# Altium PCB PCB.PcbDoc (part 6 of 6)
Units mm, origin at the board's own origin, x right, y up, seen from the top; angles counter-clockwise.
Board outline 56.61 x 57.68 mm, 2 copper layers (Top Layer, Bottom Layer), stack 0.572 mm thick; 104 components, 100 nets, 551 pads, 332 vias.
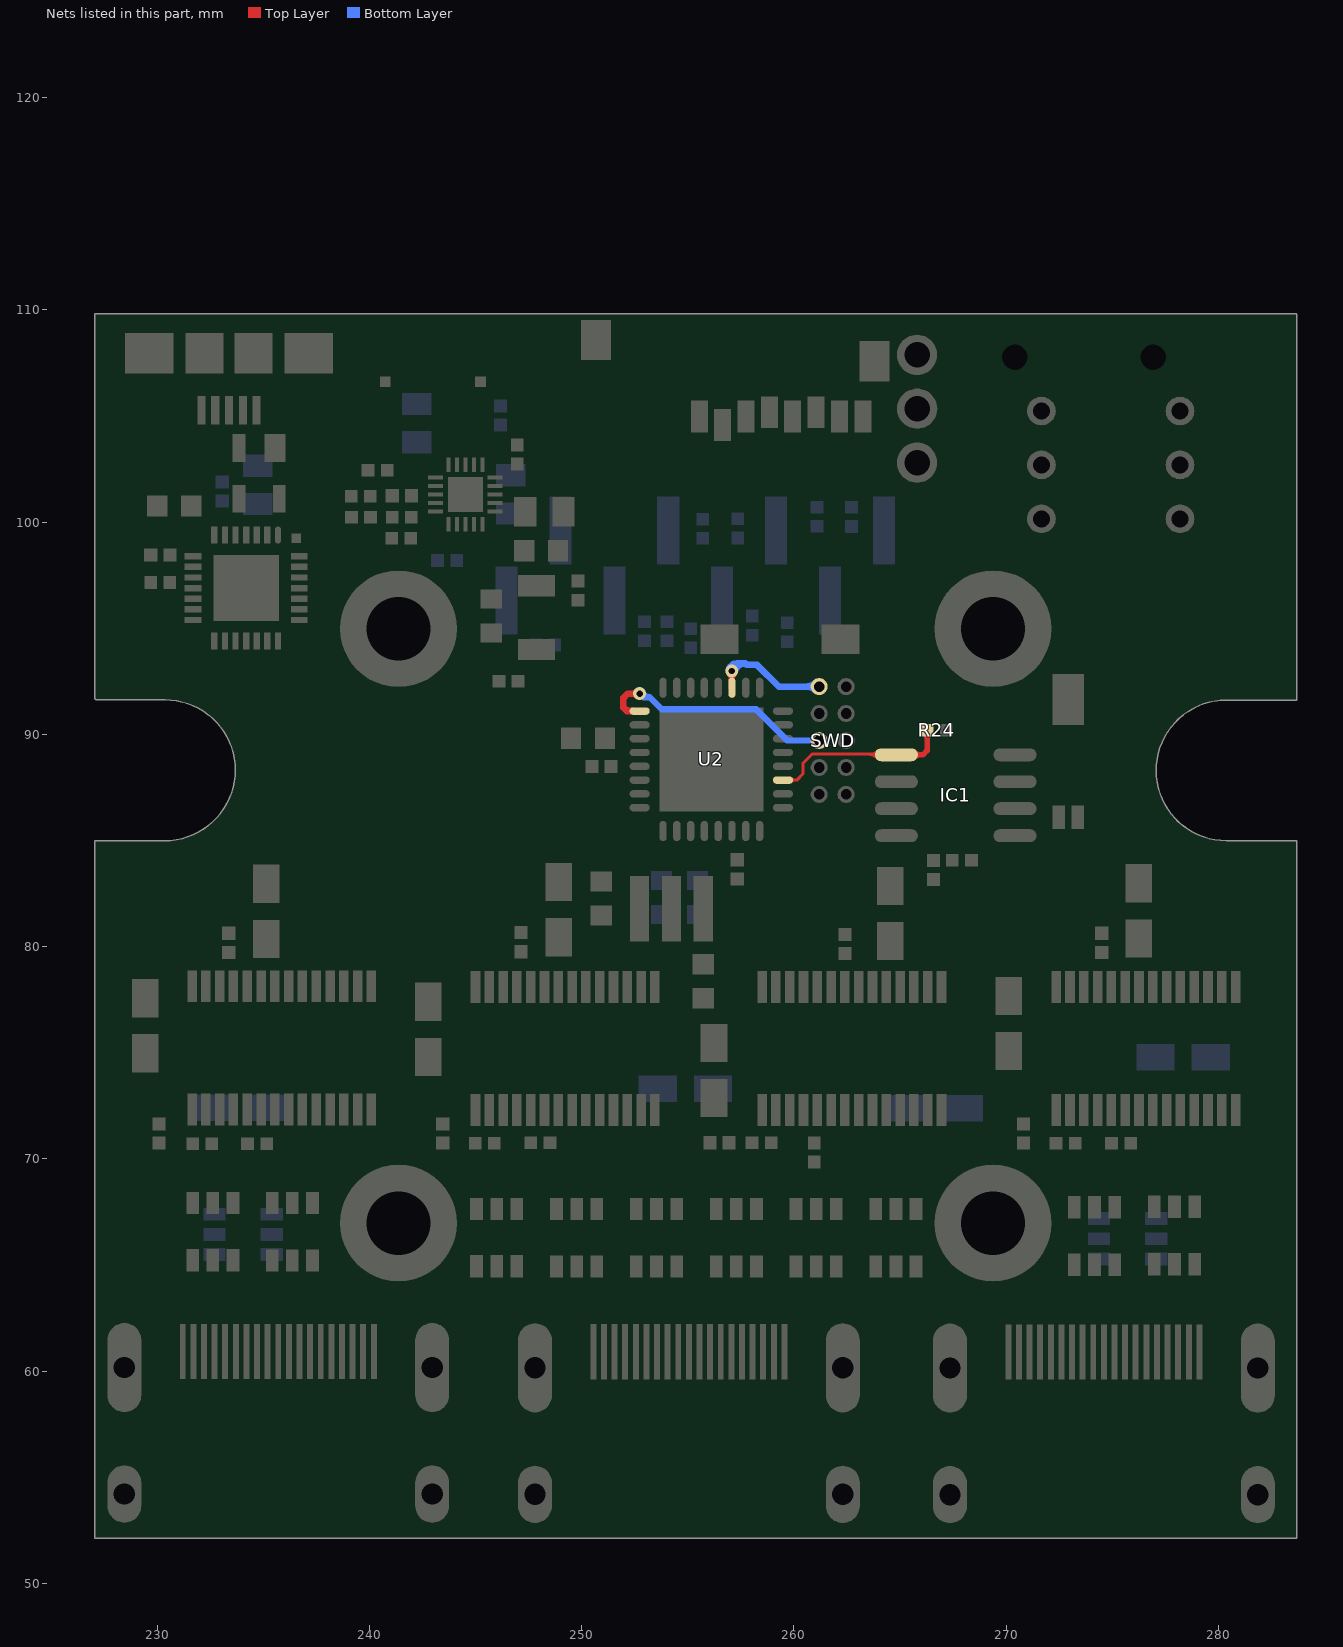
[diagram p6: the nets of this part, all layers, seen from the top]

## Via types
v1: diameter 0.6, hole 0.3, Top Layer to Bottom Layer, tented both sides, 242 vias
v2: diameter 0.6, hole 0.2, Top Layer to Bottom Layer, tented both sides, 80 vias
v3: diameter 0.8, hole 0.4, Top Layer to Bottom Layer, tented both sides, 9 vias
v4: diameter 0.66, hole 0.33, Top Layer to Bottom Layer, tented both sides, 1 vias

## Nets (pads, with @x,y where several pads share a name; then routed paths per layer and width w, separated by ;. In a path a pad name is that pad's centre, name@x,y a point inside that pad or via, vN(x,y) a via of type N, cw(c..) or ccw(c..) an arc to the next point about the centre after c; other vN are vias at no path point) (continued)
SDA: IC1.5 R24.2 U2.11 | length 13.7
  Top Layer w0.152: U2.11@259.483,87.849 260.137,87.849 260.426,88.138 260.426,88.646 260.852,89.071 IC1.5@264.794,89.071 ; 260.022,87.849 ccw(c260.022,87.61) 259.853,87.779 cw(c260.022,87.61) 260.022,87.849 ; 260.022,87.849 cw(c260.022,88.087) 259.853,87.919 ccw(c260.022,88.087) 260.022,87.849 ; 263.487,89.071 cw(c263.487,88.412) 263.953,88.878 ccw(c263.487,88.412) 263.487,89.071 ; 263.638,89.071 ccw(c263.638,89.516) 263.953,89.202 cw(c263.638,89.516) 263.638,89.071
  Top Layer w0.254: IC1.5@264.825,89.04 266.078,89.04 266.275,89.237 R24.2@266.275,90.195 ; 265.966,89.04 ccw(c265.966,88.611) 265.662,88.914 cw(c265.966,88.611) 265.966,89.04 ; 265.966,89.04 cw(c265.966,89.469) 265.662,89.166 ccw(c265.966,89.469) 265.966,89.04 ; 266.275,89.778 ccw(c265.858,89.778) 266.153,90.073 cw(c265.858,89.778) 266.275,89.778 ; 266.275,89.778 cw(c266.693,89.778) 266.398,90.073 ccw(c266.693,89.778) 266.275,89.778
SWCLK: SWD.1 U2.19 | length 11.8
  Top Layer w0.305: U2.19@257.073,92.209 v1(257.073,92.989) ; U2.19@257.073,92.633 ccw(c256.717,92.633) 256.969,92.885 cw(c256.717,92.633) U2.19@257.073,92.633 ; U2.19@257.073,92.633 cw(c257.43,92.633) 257.178,92.885 ccw(c257.43,92.633) U2.19@257.073,92.633
  Bottom Layer w0.305: v1(257.073,92.989) 257.073,93.066 257.353,93.345 ; SWD.1@261.188,92.253 259.283,92.253 258.262,93.274 257.788,93.274 257.717,93.345 ; 257.353,93.345 ccw(c257.673,93.024) 257.221,92.998 cw(c257.673,93.024) 257.353,93.345 ; 257.353,93.345 257.717,93.345 ; 257.717,93.345 ccw(c257.717,92.83) 257.217,92.954 cw(c257.717,92.83) 257.717,93.345 ; 260.59,92.253 ccw(c260.59,92.851) 261.013,92.428 cw(c260.59,92.851) 260.59,92.253 ; 260.59,92.253 cw(c260.59,91.655) 261.013,92.078 ccw(c260.59,91.655) 260.59,92.253 ; v1@256.921,93.027 cw(c257.327,92.926) 257.327,93.345 ccw(c257.327,92.926) v1@256.921,93.027
SWDIO: SWD.5 U2.25 | length 14.5
  Top Layer w0.305: v1@252.705,91.923 252.171,91.923 251.968,91.719 251.968,91.262 ; U2.25@252.733,91.099 252.131,91.099 251.968,91.262 ; 251.968,91.262 ccw(c252.331,91.626) 252.429,91.121 cw(c252.331,91.626) 251.968,91.262 ; 252.374,91.923 ccw(c252.374,92.279) 252.626,92.027 cw(c252.374,92.279) 252.374,91.923 ; 252.374,91.923 cw(c252.374,91.566) 252.626,91.818 ccw(c252.374,91.566) 252.374,91.923
  Bottom Layer w0.305: v1(252.73,91.923) 252.755,91.923 252.933,91.745 253.213,91.745 ; SWD.5@261.188,89.713 259.69,89.713 258.216,91.186 253.771,91.186 253.213,91.745 ; 253.213,91.745 cw(c253.213,92.118) 252.867,91.978 ccw(c253.213,92.118) 253.213,91.745
pads on no net: "SD CON.1" "SD CON.8" "SD CON." "SD CON.CD" "SD CON.COM" IC1.7 MEASURMENT.1 MEASURMENT.4 POWER.1 POWER.4 SWD.7 U1A.7 U1A.8 U1A.19 U1A.20 U1A.25 U1B.7 U1B.8 U1B.19 U1B.20 U1B.25 U1C.7 U1C.8 U1C.19 U1C.20 U1C.25 U1D.7 U1D.8 U1D.19 U1D.20 U1D.25 U2.1 U2.9 U2.12 U2.13 U2.16 U2.20 U2.21 U2.27 U2.28 U3.0 U3.1 U3.2 U3.3 U3.10 U3.11 U3.12 U3.13 U3.14 U3.15 U3.16 U3.17 U3.18 U3.19 U3.20 U3.21 U3.22 U3.23 U3.24 U3.27 U3.28 U3.29 U4.4 USB.4

## Polygon pours and split planes (outlines as drawn)
GND on Top Layer "Bottom Layer-No Net" (solid, pour order 1000): 226.974,109.88 226.974,91.567 227,91.542 230.937,91.542 231.089,91.542 233.375,89.256 233.401,89.23 233.401,86.766 232.918,86.766 231.292,85.141 231.216,85.065 227,85.065 227,52.095 227.152,51.943 227.279,52.07 283.769,52.07 283.769,85.065 280.213,85.065 279.629,85.065 277.368,87.325 277.368,89.687 277.419,89.687 278.867,91.135 279.171,91.44 281.153,91.44 283.667,91.44 283.743,91.516 283.718,91.542 283.718,109.855
GND on Bottom Layer "Bottom Layer-No Net" (solid, pour order 1001): 226.924,109.906 226.924,91.643 226.898,91.618 226.898,91.567 230.861,91.567 231.445,90.983 233.197,89.23 233.197,86.716 233.197,86.665 231.902,85.369 231.826,85.293 228.168,85.293 226.974,85.293 226.949,85.268 226.974,85.242 226.974,52.045 283.845,52.045 283.87,52.07 283.82,52.121 283.82,85.115 279.248,85.115 277.622,86.741 277.749,86.868 277.749,90.043 277.774,90.043 278.689,90.957 278.968,91.237 280.34,91.237 280.467,91.237 280.797,91.567 280.822,91.542 283.743,91.542 283.743,109.779 283.667,109.855

## Keep-outs
Keep-Out Layer:
  lines w0.127: 227.025,109.804 227.025,91.643 227.043,91.625 230.675,91.625 ; 227.07,109.81 283.67,109.81 ; 227.076,52.148 227.076,84.988 ; 227.085,52.145 283.68,52.145 283.68,84.985 ; 227.101,84.988 230.361,84.988 ; 230.35,84.99 ccw(c230.352,88.328) 233.69,88.325 ccw(c230.383,88.317) 230.375,91.625 ; 277.061,88.321 ccw(c280.376,88.331) 280.386,85.016 ; 277.065,88.295 cw(c280.38,88.305) 280.37,91.62 283.68,91.62 283.68,109.8 ; 280.365,85.014 283.668,85.014

## Silkscreen, mask and mechanical layers (free items; w line width, h text height)
Mechanical 1:
  lines w0.127: 227.025,109.804 227.025,91.643 227.043,91.625 230.675,91.625 ; 227.07,52.123 227.07,84.963 ; 227.07,109.81 283.67,109.81 ; 227.085,52.145 283.68,52.145 283.68,84.985 ; 227.09,84.99 230.35,84.99 ccw(c230.352,88.328) 233.69,88.325 ccw(c230.383,88.317) 230.375,91.625 ; 277.061,88.321 ccw(c280.376,88.331) 280.386,85.016 ; 277.065,88.295 cw(c280.38,88.305) 280.37,91.62 283.68,91.62 283.68,109.8 ; 280.365,85.014 283.668,85.014

## Text inside footprints (layer, text, board x,y; h text height)
"BAT CON": Bottom Overlay "1" at 264.532,109.053 h0.8 r90; Mechanical 14 "1" at 264.532,109.053 h0.8 r90
MEASURMENT: Bottom Overlay "2" at 276.936,100.533 h0.8 r90; Bottom Overlay "1" at 276.936,105.359 h0.8 r90; Bottom Overlay "3" at 276.936,103.073 h0.8 r90
POWER: Bottom Overlay "3" at 270.408,103.073 h0.8 r90; Bottom Overlay "1" at 270.408,105.359 h0.8 r90; Bottom Overlay "2" at 270.408,100.533 h0.8 r90